# Altium PCB timer.PcbDoc (part 2 of 2)
Units mm, origin at the board's own origin, x right, y up, seen from the top; angles counter-clockwise.
Board outline 100 x 100 mm, 4 copper layers (Top Layer, Int1 (GND), Int2 (PWR), Bottom Layer), stack 1.369 mm thick; 158 components, 108 nets, 457 pads, 145 vias.
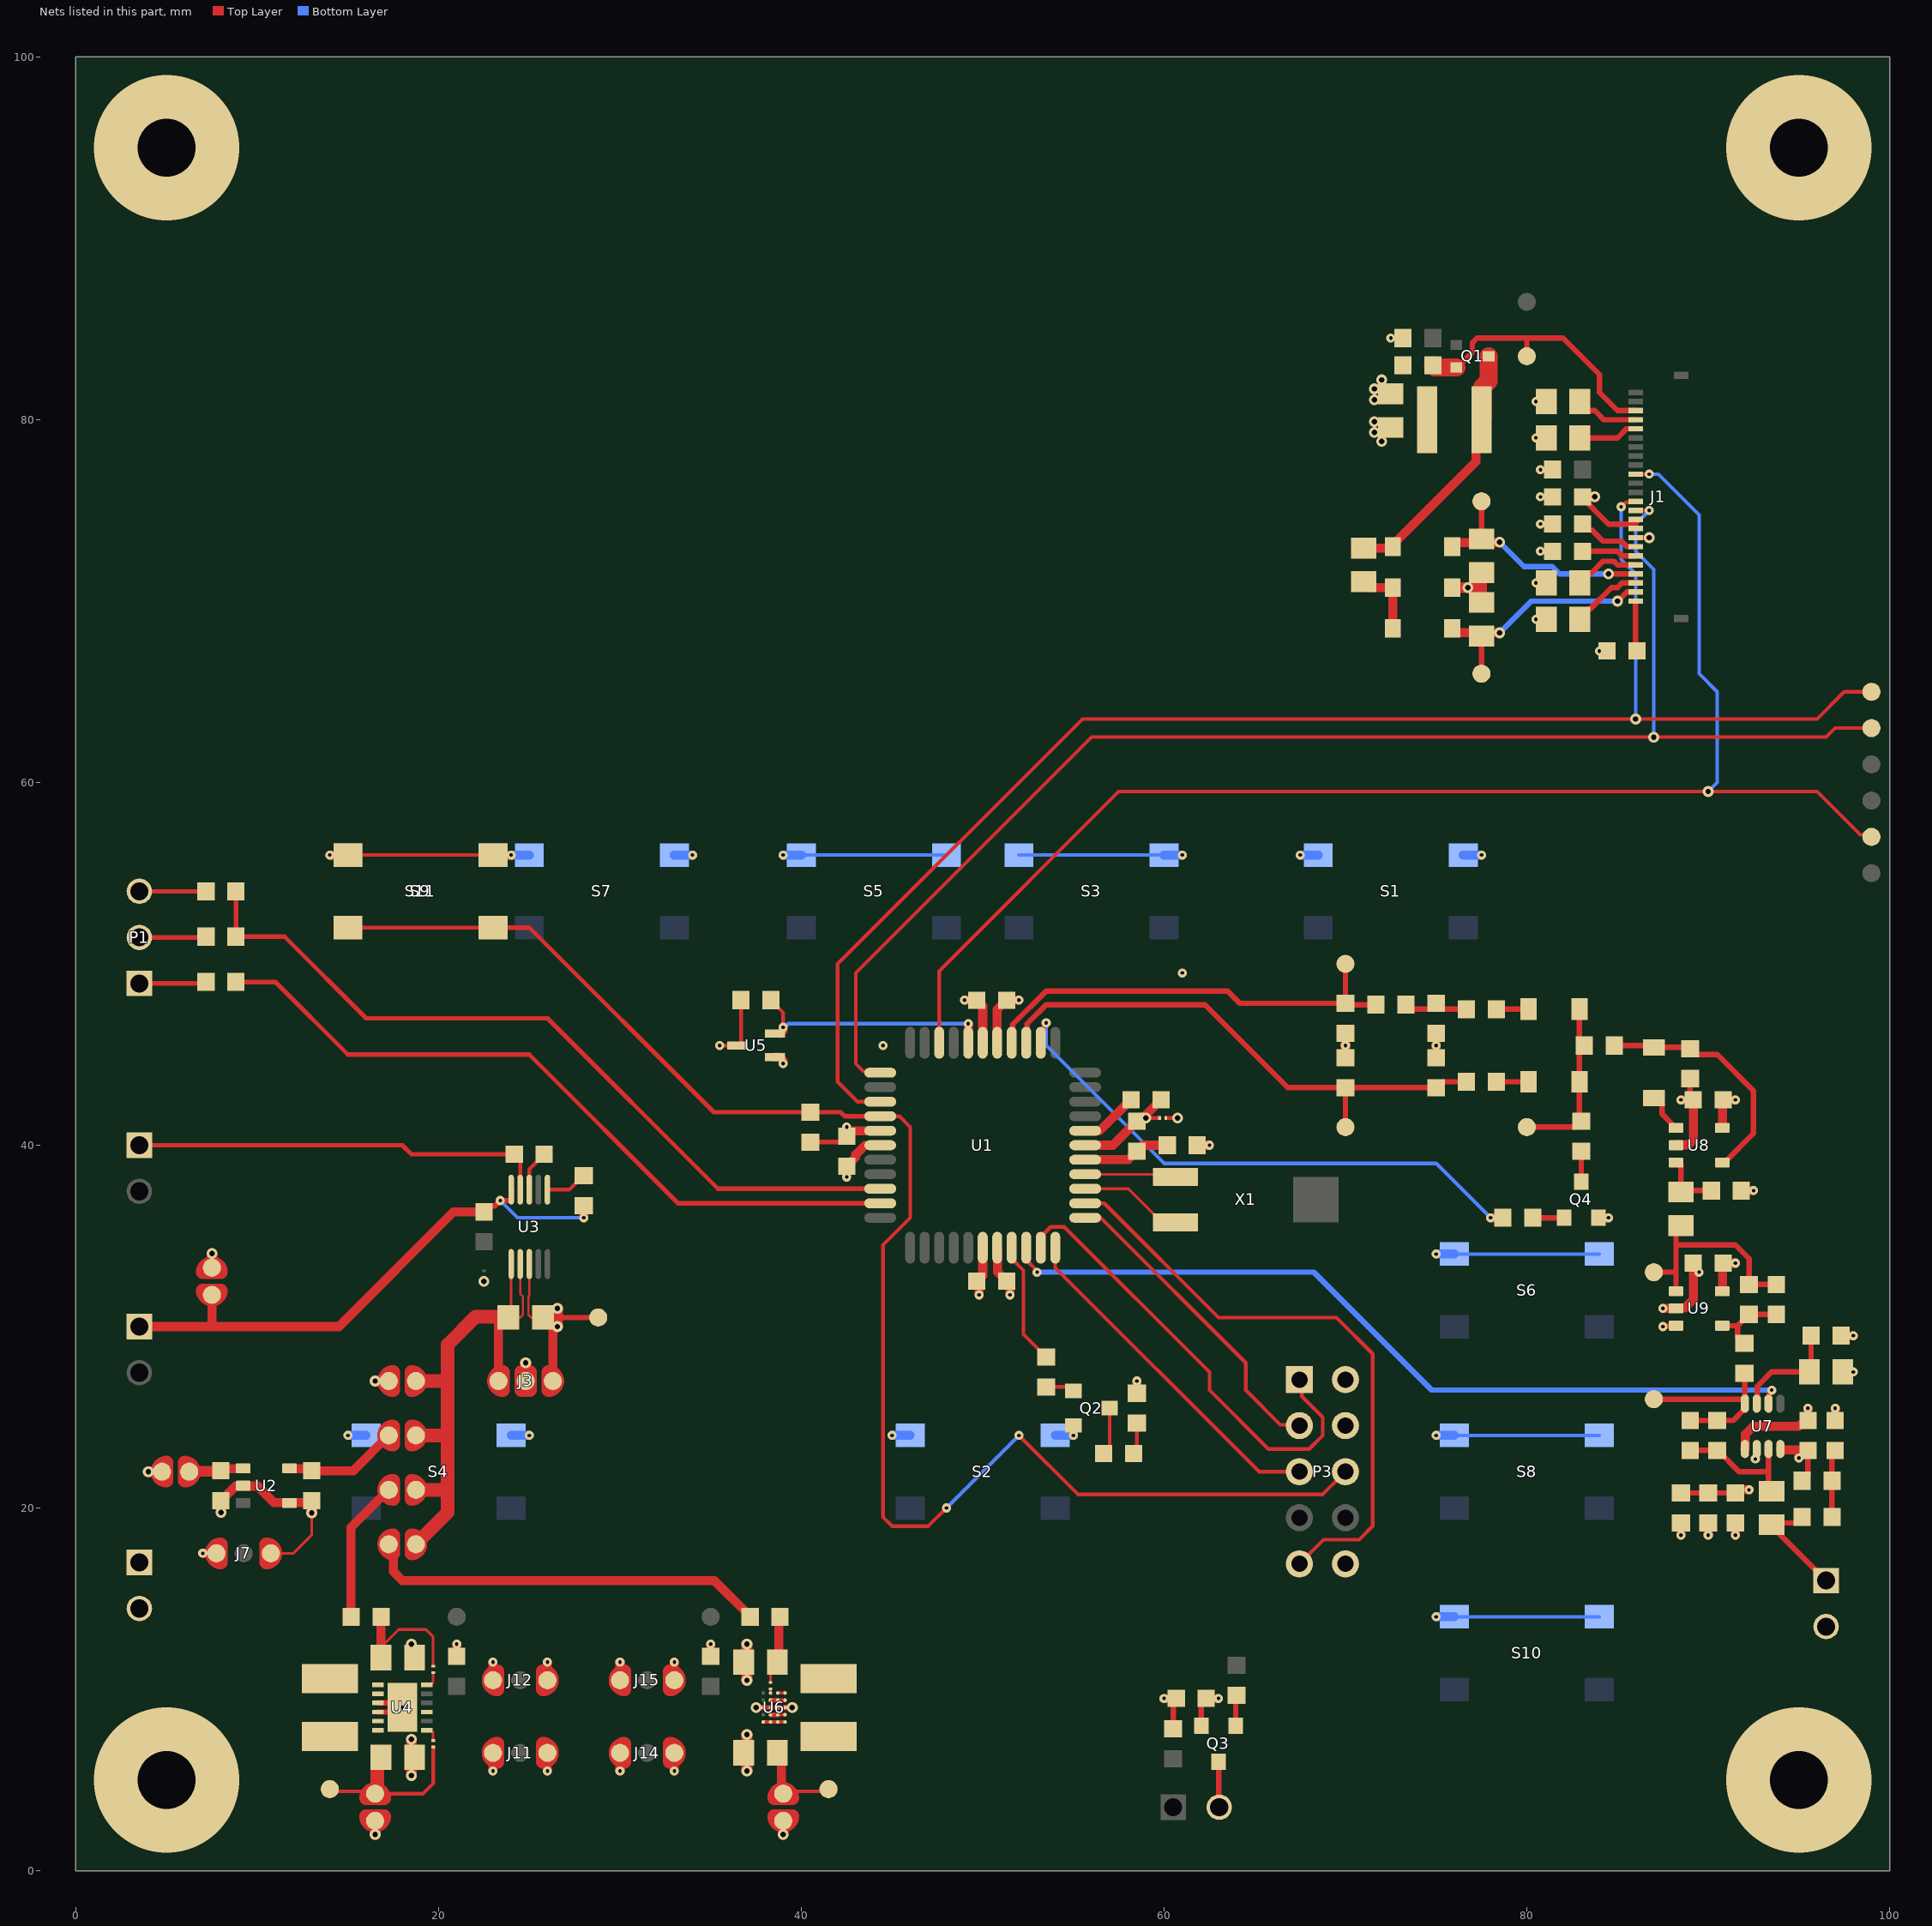
[diagram p4: the nets of this part, all layers, seen from the top]

## Via types
v1: diameter 0.5, hole 0.2, Top Layer to Bottom Layer, tented both sides, 98 vias
v2: diameter 0.6, hole 0.3, Top Layer to Bottom Layer, tented both sides, 41 vias
v3: diameter 8, hole 3.2, Top Layer to Bottom Layer, 4 vias
v4: diameter 0.6, hole 0.3, Top Layer to Bottom Layer, 2 vias

## Nets (pads, with @x,y where several pads share a name; then routed paths per layer and width w, separated by ;. In a path a pad name is that pad's centre, name@x,y a point inside that pad or via, vN(x,y) a via of type N, cw(c..) or ccw(c..) an arc to the next point about the centre after c; other vN are vias at no path point) (continued)
GND: C1.1 C2.1 C3.1 C5.2 C6.1 C7.1 C8.1 C9.1 C10.1 C11.1 C12.1 C13.1 C14.1 C15.1 C16.1 C17.1 C18.1 C19.1 C20.1 C23.1 C24.1 C25.1 C26.1 C27.1 C28.1 D2.2 J1.17 J7.1 J11.1 J12.1 J14.1 J15.1 NT1.1 NT2.1 NT5.1 P1.3 P3.2 P3.10 P4.2 Q2.2 Q3.2 R1.2 R2.2 R3.2 R6.2 S1.3 S1.4 S2.3 S2.4 S3.3 S3.4 S4.3 S4.4 S5.3 S5.4 S6.3 S6.4 S7.3 S7.4 S8.3 S8.4 S9.3 S9.4 S10.3 S10.4 S11.1 S11.2 U1.6 U1.18 U1.28 U1.39 U2.2 U2.4 U4.0 U4.9 U4.10 U5.1 U6.A3 U6.B3 U6.C3 U6.D3 | length 117.1
  Top Layer w0.15: J7.1@10.75,17.5 12,17.5 13,18.5 v2(13,19.73)
  Top Layer w0.2: S11.1@15,56 S11.2@23,56 ; v4(59,41.5) NT1.1@59.75,41.5
  Top Layer w0.25: P1.3@3.5,54 R6.2@7.175,54 ; U6.D3@37.9,9 U6.C3@38.3,9 U6.B3@38.7,9 U6.A3@39.1,9 ; C14.1@58.875,41.55 58.925,41.5 v4(59,41.5)
  Top Layer w0.3: U4.10@16.65,8.75 17.75,8.75 v1(18,9) 17.75,9.25 U4.9@16.65,9.25 ; v2(37.5,9) U6.D3@37.9,9 ; U6.A3@39.1,9 v2(39.5,9) ; Q3.2@62.05,8 62.05,9.225 C13.1@62.325,9.5 ; J1.17@86,73.5 v2(86.75,73.5)
  Top Layer w0.5: C19.1@8,20.405 8.8,21.205 9.2,21.205 U2.2@9.225,21.23 9.25,21.205 10.025,21.205 10.925,20.305 11.75,20.305 U2.4@11.775,20.28 11.8,20.305 12.9,20.305 C20.1@13,20.405 ; v1(14,56) S11.1@15,56 ; C25.1@21,12 v1(21,12.5) ; v1(23,5.5) J11.1@23,6 ; 23,11 v1(23,11.5) ; S11.2@23,56 v1(24,56) ; v1(33,5.5) J14.1@33,6 ; 33,11 v1(33,11.5) ; C28.1@35,12 v1(35,12.5) ; U5.1@38.55,44.85 38.825,44.85 39,44.675 v1(39,44.5) ; v1(42.5,38.25) C16.1@42.5,38.85 43,39.35 43,39.5 43.016,39.5 43.506,39.99 44.34,39.99 U1.6@44.35,40 ; v1(49,48) C18.1@49.675,48 50,47.675 U1.39@50,45.65 ; U1.18@50.8,34.35 50.81,34.34 50.81,33.015 C17.1@51.325,32.5 51.5,32.325 v1(51.5,31.75) ; v1(55,24) Q2.2@55,24.55 ; U1.28@55.65,40 57.175,40 C14.1@58.5,41.325 58.725,41.55 58.875,41.55 C15.1@59.825,42.5 ; C13.1@62.325,9.5 v1(63,9.5)
  Top Layer w0.6: v2(8,19.75) C19.1@8,20.405 ; C20.1@12.9,20.305 12.925,20.305 13,20.23 v2(13,19.73) ; v2(18.5,5.25) v2(18.5,7.25) ; v2(18.5,12.5) 18.5,12 18.5,11.925 C24.1@18.675,11.75 ; v2(37,5.5) v2(37,7.5) ; v2(37,10.5) v2(37,12.5) ; D2.2@75.885,70.75 v2(76.75,70.75) 77.5,70.75 ; C1.1@77.5,69.925 77.5,70.75 ; C5.2@77.5,71.575 77.5,70.75
  Bottom Layer w0.2: S5.3@40,56 S5.4@48,56 ; S3.3@52,56 S3.4@60,56 ; S10.3@76,14 S10.4@84,14 ; S8.3@76,24 S8.4@84,24 ; S6.3@76,34 S6.4@84,34
  Bottom Layer w0.5: v1(14,56) S9.3@15,56 ; v1(15,24) S4.3@16,24 ; S9.4@23,56 S7.3@25,56 ; S4.4@24,24 v1(25,24) ; S7.4@33,56 v1(34,56) ; v1(39,56) S5.3@40,56 ; v1(45,24) S2.3@46,24 ; S2.4@54,24 v1(55,24) ; S3.4@60,56 v1(61,56) ; v1(67.5,56) S1.3@68.5,56 ; v1(75,14) S10.3@76,14 ; v1(75,24) S8.3@76,24 ; v1(75,34) S6.3@76,34 ; S1.4@76.5,56 v1(77.5,56)
  other v1: 44.5,45.5 84,67.25 80.5,69 80.5,71 80.75,72.75 80.75,74.25 80.75,75.75 80.75,77.25 80.5,79 80.5,81 72.5,84.5
  other v2: 22.5,32.5 71.6,81.1 71.6,81.7 72,82.2
  other v3: 5,5 95,5 5,95 95,95
ISENSE: C21.2 P5.1 U3.9 | length 23
  Top Layer w0.2: C21.2@24.175,39.5 24.5,39.175 U3.9@24.5,37.55
  Top Layer w0.25: P5.1@3.5,40 18,40 18.5,39.5 C21.2@24.175,39.5
LOWBAT: R14.2 U1.40 U5.2 | length 14.1
  Top Layer w0.2: R14.2@38.325,48 38.325,47.975 39,47.3 v1(39,46.5) 39,46.325 39,46.275 38.875,46.15 38.825,46.15 U5.2@38.55,46.15
  Top Layer w0.5: U5.2@38.825,46.15 U5.2@39,46.325 ; U1.40@49.2,45.65 v1(49.2,46.7)
  Bottom Layer w0.2: v1(39,46.5) 39.081,46.5 39.281,46.7 v1(49.2,46.7)
MIC_AMP: C30.2 C34.1 R16.1 TP19.0 U9.1 | length 12.3
  Top Layer w0.3: TP19.0@87,33 88.225,33 ; U9.1@88.225,31.95 88.225,33 ; C34.1@88.5,35.675 88.225,35.4 88.225,34.5 ; C30.2@93.75,32.325 R16.1@92.25,32.325 92.25,33.75 91.5,34.5 88.225,34.5 ; 88.225,33 88.225,34.5
MIC_BLANK: R31.2 U1.35 | length 31.6
  Top Layer w0.2: U1.35@53.2,45.65 53.2,46.345 53.443,46.587 53.443,46.693 v1(53.5,46.75)
  Top Layer w0.5: v1(78,36) R31.2@78.675,36
  Bottom Layer w0.2: v1(53.5,46.75) 53.5,45.5 60,39 75,39 v1(78,36)
MIC_FAST: R19.1 R21.1 TP16.0 U1.37 | length 24.3
  Top Layer w0.3: U1.37@51.6,45.65 51.648,45.698 51.648,46.648 53.5,48.5 63.5,48.5 64.175,47.825 R21.1@70,47.825 ; TP16.0@70,50 R21.1@70,47.825 ; R19.1@71.675,47.75 70.075,47.75 R21.1@70,47.825
MIC_OFF: U1.20 U7.6 | length 45.6
  Top Layer w0.2: U1.20@52.4,34.35 52.4,33.675 53,33.075 v1(53,33)
  Top Layer w0.3: U7.6@93.325,25.75 93.354,25.779 93.354,26.3 93.5,26.446 v1(93.5,26.5)
  Bottom Layer w0.3: v1(53,33) 68.25,33 74.75,26.5 v1(93.5,26.5)
MIC_PRE: C37.1 R22.2 R29.2 TP17.0 U7.8 | length 10.3
  Top Layer w0.3: TP17.0@87,26 U7.8@92,26 ; C37.1@89,24.825 R29.2@90.5,24.825 91.375,24.825 92.025,25.475 U7.8@92.025,25.75 92.025,27.4 R22.2@92,27.425
MIC_RECT: D5.2 D7.2 R23.1 R30.1 TP18.0 | length 9.4
  Top Layer w0.3: TP18.0@80,41 82.675,41 R30.1@83,41.325 82.9,41.425 D7.2@82.9,43.5 D5.2@82.9,47.5
MIC_SLOW: C36.2 R27.1 R28.1 TP20.0 U1.36 | length 29.9
  Top Layer w0.3: U1.36@52.4,45.65 52.448,45.698 52.448,46.698 53.5,47.75 62.25,47.75 66.825,43.175 R28.1@70,43.175 ; TP20.0@70,41 R28.1@70,43.175 ; R27.1@76.675,43.5 75.325,43.5 C36.2@75,43.175 R28.1@70,43.175
MOSI: J1.14 TP8.0 U1.1 | length 82.1
  Top Layer w0.2: U1.1@44.35,44 44.283,44.067 43.433,44.067 43,44.5 43,49.5 56,62.5 v2(87,62.5) 96.5,62.5 97,63 TP8.0@99,63 ; J1.14@86,75 v1(86.75,75)
  Bottom Layer w0.2: v1(86.75,75) 86,74.25 86,72.75 87,71.75 v2(87,62.5)
NetC4_1: C4.1 D3.1 L1.2 Q1.3 | length 14.3
  Top Layer w0.5: C4.1@71,72.925 72.425,72.925 77.2,77.7 77.2,79.7 L1.2@77.5,80
  Top Layer w1: L1.2@77.5,80 77.55,80.05 77.55,81.8 77.889,82.139 Q1.3@77.889,83.5
NetC4_2: C4.2 D1.2 D2.1 | length 4
  Top Layer w0.5: C4.2@71,71 71.25,70.75 D2.1@72.615,70.75 D1.2@72.615,68.5
NetC14_2: C14.2 L2.1 U1.27 | length 4.9
  Top Layer w0.5: U1.27@55.65,39.2 58.025,39.2 C14.2@58.5,39.675 58.825,40 L2.1@60.175,40
NetC15_2: C15.2 U1.29 | length 3.2
  Top Layer w0.5: U1.29@55.65,40.8 55.66,40.81 56.469,40.81 57.859,42.2 57.875,42.2 C15.2@58.175,42.5
NetC21_1: C21.1 U3.8 | length 2.3
  Top Layer w0.2: U3.8@25,37.55 25,38.675 C21.1@25.825,39.5
NetC29_2: C29.2 L7.1 U7.7 | length 6.2
  Top Layer w0.3: U7.7@92.675,25.75 92.7,25.775 92.7,26.7 93.5,27.5 C29.2@95.575,27.5 95.675,27.6 L7.1@95.675,29.5
NetC30_1: C30.1 R16.2 R22.1 U9.4 | length 4.4
  Top Layer w0.3: U9.4@90.775,30.05 91.625,30.05 ; R22.1@92,29.075 91.975,29.075 91.65,29.4 91.65,29.425 91.625,29.45 91.625,30.05 ; C30.1@93.75,30.675 R16.2@92.25,30.675 92.225,30.675 91.801,30.251 91.801,30.226 91.625,30.05
NetC31_2: C31.2 R15.1 R24.1 | length 3.7
  Top Layer w0.3: R24.1@96.825,19.5 R15.1@96.825,21.5 96.825,23 C31.2@97,23.175
NetC33_2: C33.2 R18.1 R19.2 | length 3.4
  Top Layer w0.3: R19.2@73.325,47.5 75,47.5 R18.1@76.675,47.5
NetC34_2: C34.2 R25.1 U8.3 | length 3.4
  Top Layer w0.3: U8.3@88.225,39.05 88.35,39.05 88.5,38.9 88.5,37.5 R25.1@90.175,37.5
NetC35_1: C35.1 P7.1 R24.2 | length 6.2
  Top Layer w0.3: R24.2@95.175,19.5 94.85,19.175 93.5,19.175 93.825,18.85 93.825,18.675 P7.1@96.5,16
NetC35_2: C35.2 C37.2 R29.1 U7.3 | length 7.1
  Top Layer w0.3: C37.2@89,23.175 R29.1@90.5,23.175 90.525,23.175 91.7,22 93.325,22 ; C35.2@93.325,21 93.325,22 ; U7.3@93.325,23.25 93.325,22
NetD4_1: D4.1 R7.2 | length 1.7
  Top Layer w0.2: D4.1@58.325,23 58.5,23.175 R7.2@58.5,24.675
NetD4_2: D4.2 Q2.3 | length 2.6
  Top Layer w0.2: D4.2@56.675,23 57,23.325 Q2.3@57,25.5
NetD5_1: D5.1 R18.2 | length 1.8
  Top Layer w0.3: R18.2@78.325,47.5 D5.1@80.1,47.5
NetD6_1: D6.1 R23.2 R26.1 U8.4 | length 13.4
  Top Layer w0.3: R23.2@84.825,45.5 86.9,45.5 D6.1@87,45.4 88.925,45.4 R26.1@89,45.325 89.325,45 90.5,45 92.5,43 92.5,40.65 90.9,39.05 U8.4@90.775,39.05
NetD6_2: D6.2 U8.1 | length 2.3
  Top Layer w0.3: D6.2@87,42.6 87.15,42.6 87.45,42.3 87.45,41.725 87.975,41.2 87.975,41.075 88.1,40.95 U8.1@88.225,40.95
NetD7_1: D7.1 R27.2 | length 1.8
  Top Layer w0.3: R27.2@78.325,43.5 D7.1@80.1,43.5
NetL3_1: L3.1 U4.11
NetL3_2: L3.2 U4.8
NetL5_1: L5.1 U6.A2 U6.B2 U6.C2 | length 0.8
  Top Layer w0.2: U6.B2@38.7,8.6 U6.A2@39.1,8.6
  Top Layer w0.25: U6.C2@38.3,8.6 U6.B2@38.7,8.6
NetL5_2: L5.2 U6.A4 U6.B4 U6.C4 | length 0.8
  Top Layer w0.2: U6.B4@38.7,9.4 U6.A4@39.1,9.4
  Top Layer w0.25: U6.C4@38.3,9.4 U6.B4@38.7,9.4
NetNT3_1: NT3.1 U4.1 | length 0.8
  Top Layer w0.15: U4.1@19.35,7.75 19.55,7.75 19.7,7.6 NT3.1@19.7,7.175
NetNT4_1: NT4.1 U4.6 | length 0.9
  Top Layer w0.15: U4.6@19.35,10.25 19.55,10.25 19.7,10.4 NT4.1@19.7,10.925
NetNT5_2: NT5.2 U4.3
NetNT6_1: NT6.1 U6.C5 | length 0.2
  Top Layer w0.15: U6.C5@38.3,9.8 NT6.1@38.3,10.025
NetP2_2: P2.2 Q3.3 | length 2.5
  Top Layer w0.3: Q3.3@63,6 63.02,5.98 63.02,3.52 P2.2@63.04,3.5
NetQ2_1: Q2.1 R9.2 | length 1.6
  Top Layer w0.2: R9.2@53.5,26.675 54.775,26.675 Q2.1@55,26.45
NetQ3_1: Q3.1 R11.1 | length 1.7
  Top Layer w0.3: Q3.1@63.95,8 63.95,9.625 R11.1@64,9.675
NetQ4_1: Q4.1 R31.1 | length 1.7
  Top Layer w0.3: R31.1@80.325,36 Q4.1@82.05,36
NetQ4_3: Q4.3 R30.2 | length 1.7
  Top Layer w0.3: Q4.3@83,38 R30.2@83,39.675
NetR9_1: R9.1 U1.19 | length 6.8
  Top Layer w0.2: U1.19@51.6,34.35 51.6,33.75 52.25,33.1 52.25,29.575 R9.1@53.5,28.325
NetR13_1: R13.1 U3.6 | length 2.3
  Top Layer w0.2: U3.6@26,37.55 27.2,37.55 27.975,38.325 R13.1@28,38.325
NetU1_25: U1.25 X1.2 | length 5.7
  Top Layer w0.15: U1.25@55.65,37.6 58.025,37.6 59.875,35.75 X1.2@60.625,35.75
NetU1_26: U1.26 X1.1 | length 5
  Top Layer w0.15: U1.26@55.65,38.4 60.475,38.4 X1.1@60.625,38.25
PREVGH: C5.1 D3.2 J1.21 TP9.0 | length 13
  Top Layer w0.3: C5.1@77.5,73.425 TP9.0@77.5,75.5 ; v2(84.5,71.5) J1.21@86,71.5
  Top Layer w0.5: D3.2@75.885,73 75.885,73.041 76.075,73.231 78.481,73.231 v2(78.5,73.25)
  Bottom Layer w0.3: v2(78.5,73.25) 79.85,71.9 81.4,71.9 81.8,71.5 v2(84.5,71.5)
PREVGL: C1.2 D1.1 J1.23 TP10.0 | length 13.2
  Top Layer w0.3: TP10.0@77.5,66 C1.2@77.5,68.075 ; v2(85,70) 85.026,70 85.526,70.5 J1.23@86,70.5
  Top Layer w0.5: D1.1@75.885,68.5 75.885,68.459 76.075,68.269 78.481,68.269 v2(78.5,68.25)
  Bottom Layer w0.3: v2(78.5,68.25) 80.25,70 v2(85,70)
PVIN1: C23.2 J10.2 NT3.2 TP12.0 U4.12 | length 9.8
  Top Layer w0.2: TP12.0@14,4.5 14.125,4.375 16.375,4.375 J10.2@16.5,4.25 19.15,4.25 19.7,4.8 NT3.2@19.7,6.825
  Top Layer w0.75: J10.2@16.625,4.625 16.625,6.05 C23.2@16.825,6.25
PVIN2: C26.2 J13.2 TP14.0 U6.A1 U6.B1 U6.C1 U6.D1 | length 6.2
  Top Layer w0.2: U6.D1@37.9,8.2 U6.C1@38.3,8.2 U6.B1@38.7,8.2 U6.A1@39.1,8.2 ; J13.2@39,4.25 39.125,4.375 41.375,4.375 TP14.0@41.5,4.5
  Top Layer w0.5: C26.2@38.675,6.5 38.904,6.271 38.904,4.346 J13.2@39,4.25
REGIN: C19.2 J6.2 U2.1 | length 3
  Top Layer w0.5: C19.2@7.973,22.028 C19.2@8,22.055 8.1,22.155 9.2,22.155 U2.1@9.225,22.18
  Top Layer w0.6: J6.2@6.25,22 6.278,22.028 C19.2@7.973,22.028
RES#: J1.10 TP4.0 U1.42 | length 80.8
  Top Layer w0.2: U1.42@47.6,45.65 47.6,49.6 57.5,59.5 v2(90,59.5) 96,59.5 98.384,57.116 98.884,57.116 TP4.0@99,57 ; J1.10@86,77 v1(86.75,77)
  Bottom Layer w0.2: v1(86.75,77) 87.25,77 89.5,74.75 89.5,66 90.5,65 90.5,60 v2(90,59.5)
RESE: J1.3 Q1.2 R3.1 TP2.0 | length 15.5
  Top Layer w0.3: Q1.2@76.111,82.878 76.162,82.878 76.291,83.007 77,83.716 77,84.25 77.25,84.5 81,84.5 82,84.5 84,82.5 84,81.5 85,80.5 J1.3@86,80.5 ; TP2.0@80,83.5 80,84.5
  Top Layer w1: R3.1@74.825,83 74.947,82.878 Q1.2@76.111,82.878
RSTN: P3.6 R10.2 S11.3 S11.4 U1.4 | length 87.3
  Top Layer w0.2: S11.3@15,52 S11.4@23,52 ; U1.4@44.35,41.6 45.4,41.6 46,41 46,36 44.5,34.5 44.5,19.5 45,19 47,19 v1(48,20) ; v1(52,24) 55.25,20.75 68.75,20.75 P3.6@70,22
  Top Layer w0.25: S11.4@23,52 25,52 35.175,41.825 R10.2@40.5,41.825 42.159,41.825 42.384,41.6 U1.4@44.35,41.6
  Bottom Layer w0.2: v1(48,20) v1(52,24)
RXD: R5.2 R6.1 U1.9 | length 43.8
  Top Layer w0.25: R6.1@8.825,54 R5.2@8.825,51.5 11.5,51.5 16,47 26,47 35.4,37.6 U1.9@44.35,37.6
RXD_I: P1.2 R5.1 | length 3.7
  Top Layer w0.25: P1.2@3.5,51.46 7.135,51.46 R5.1@7.175,51.5
SCK: J1.13 TP7.0 U1.3 | length 85.5
  Top Layer w0.2: U1.3@44.35,42.4 43.1,42.4 42,43.5 42,50 55.5,63.5 v2(86,63.5) 96,63.5 97.5,65 TP7.0@99,65 ; v1(85.2,75.2) 85.217,75.2 85.467,75.45 85.95,75.45 J1.13@86,75.5
  Bottom Layer w0.2: v1(85.2,75.2) 85.2,72.3 86,71.5 v2(86,63.5)
SGND: C29.1 C31.1 C32.1 C33.1 C36.1 C38.1 C39.1 C40.1 NT1.2 P7.2 Q4.2 R20.2 R21.2 R25.2 R26.2 R28.2 U7.1 U8.2 U9.2 | length 20.9
  Top Layer w0.2: NT1.2@60.1,41.5 v4(60.75,41.5)
  Top Layer w0.3: R26.2@89,43.675 89,42.675 C40.1@89.175,42.5
  Top Layer w0.5: R28.2@70,44.825 R21.2@70,46.175 ; C36.1@75,44.825 v1(75,45.5) C33.1@75,46.175 ; Q4.2@83.95,36 v1(84.5,36) ; v1(87.5,31) U9.2@88.225,31 88.25,31.025 88.707,31.025 89.175,31.493 C39.1@89.175,33.5 ; U8.2@88.225,40 88.25,40.025 88.907,40.025 89.175,40.293 C40.1@89.175,42.5 v1(88.5,42.5) ; v1(90,18.5) R20.2@90,19.175 ; v1(91.5,18.5) C32.1@91.5,19.175 ; R25.2@91.825,37.5 v1(92.5,37.5) ; U7.1@92.025,23.25 92.05,23.275 92.05,24.05 92.5,24.5 95,24.5 95.1,24.6 95.275,24.6 C38.1@95.5,24.825 v1(95.5,25.5) ; C31.1@97,24.825 v1(97,25.5)
  other v1: 98,27.5 89.5,33 70,45.5 61,49.5
TCK: P3.1 U1.21 | length 26
  Top Layer w0.2: U1.21@53.2,34.35 53.2,34.95 53.75,35.5 54.5,35.5 62.5,27.5 62.5,26.5 65.75,23.25 68,23.25 68.75,24 68.75,25 67.603,26.147 67.603,26.937 P3.1@67.46,27.08
TDI: P3.9 U1.24 | length 33.7
  Top Layer w0.2: U1.24@55.65,36.8 56.7,36.8 63,30.5 69.5,30.5 71.5,28.5 71.5,19 70.75,18.25 68.79,18.25 P3.9@67.46,16.92
TDO: P3.3 U1.23 | length 17.4
  Top Layer w0.2: U1.23@55.65,36 56.5,36 64.5,28 64.5,26.5 66.41,24.59 67.41,24.59 P3.3@67.46,24.54
TMS: P3.5 U1.22 | length 19.2
  Top Layer w0.2: U1.22@54,34.35 54,33.245 65.245,22 P3.5@67.46,22
TXD: R4.2 U1.10 | length 40.6
  Top Layer w0.25: R4.2@8.825,49 11,49 15,45 25,45 33.2,36.8 U1.10@44.35,36.8
TXD_O: P1.1 R4.1 | length 3.7
  Top Layer w0.25: P1.1@3.5,48.92 7.095,48.92 R4.1@7.175,49
VBAT: J2.1 J6.1 J7.3 J9.2 J10.1 J11.3 J12.3 J13.1 J14.3 J15.3 P4.1 | length 6
  Top Layer w0.5: v1(7,17.5) J7.3@7.5,17.5 ; v1(26,5.5) J11.3@26,6 ; 26,11 v1(26,11.5) ; v1(30,5.5) J14.3@30,6 ; 30,11 v1(30,11.5)
  Top Layer w0.6: v2(4,22) J6.1@4.5,22 ; J9.2@7.5,33 J9.2@7.5,33.25 v2(7.5,34.027) ; v2(16.5,2) J10.1@16.5,2.5 ; v2(16.5,27) J2.1@17.25,27 J2.1@17.5,27 ; v2(39,2) J13.1@39,2.5
VBIAS: C38.2 C39.2 C40.2 R15.2 R17.1 U7.4 U8.5 U9.5 | length 9
  Top Layer w0.3: R15.2@95.175,21.5 95.5,21.825 C38.2@95.5,23.175
  Top Layer w0.5: v1(88.5,18.5) R17.1@88.5,19.175 ; U9.5@90.775,31.95 90.8,31.975 90.8,33.475 C39.2@90.825,33.5 v1(91.5,33.5) ; U8.5@90.775,40.95 90.8,40.975 90.8,42.475 C40.2@90.825,42.5 v1(91.5,42.5) ; U7.4@93.975,23.25 93.975,23.237 94,23.213 95,23.213 ; v1(95,22.75) 95,23.213 ; C38.2@95.5,23.175 95.462,23.213 95,23.213
VCC: C13.2 C16.2 C17.2 C18.2 J3.1 L2.2 L7.2 P3.4 R7.1 R8.2 R10.1 R12.2 R14.1 TP11.0 U1.5 U1.17 U1.38 U3.3 U5.3 | length 28.9
  Top Layer w0.127: U3.3@25,33.45 25,31.7 24.95,31.65 24.95,30.65 25.1,30.5 R12.2@25.75,30.5
  Top Layer w0.2: v1(35.5,45.5) U5.3@36.45,45.5 36.55,45.5 36.675,45.625 R14.1@36.675,48 ; C16.2@42.175,40.175 C16.2@42.5,40.5
  Top Layer w0.25: R10.1@40.5,40.175 C16.2@42.175,40.175
  Top Layer w0.3: R12.2@25.75,30.5 26.55,30.5 TP11.0@28.8,30.5 ; R8.2@60.5,7.825 60.5,9.325 C13.2@60.675,9.5
  Top Layer w0.5: J3.1@26.3,27 R12.2@26.3,29.973 ; C16.2@42.5,40.5 42.8,40.8 U1.5@44.35,40.8 ; v1(49.8,31.75) 49.8,32.375 C17.2@49.675,32.5 50,32.825 U1.17@50,34.35 ; U1.38@50.8,45.65 50.8,47.475 C18.2@51.325,48 v1(52,48) ; R7.1@58.5,26.325 v1(58.5,27) ; v1(60,9.5) C13.2@60.675,9.5 ; L2.2@61.825,40 v1(62.5,40) ; L7.2@97.325,29.5 v1(98,29.5)
  Top Layer w0.6: v2(26.55,30) 26.55,30.5 v2(26.55,31)
  other v1: 42.5,41
VCC_EPD: C6.2 C7.2 J1.15 J1.16 J3.2 L1.1 | length 6.1
  Top Layer w0.3: C7.2@83,75.75 84.5,74.25 86,74.25 ; J1.16@86,74 86,74.25 ; J1.15@86,74.5 86,74.25
  Top Layer w0.6: J3.2@24.8,27 v2@24.8,27.75 ; v2(24.8,28) v2@24.8,27.75 ; 25.05,27.5 v2@24.8,27.75 ; C7.2@83.075,75.75 v2(83.75,75.75)
  other v2: 72,78.8 71.6,79.3 71.6,79.9
VCC_ISENSE: C22.2 J9.1 P6.1 R13.2 U3.10 | length 31.5
  Top Layer w0.3: C22.2@22.5,36.325 22.825,36.65 23.1,36.65 v1(23.4,36.95) 24,36.95 U3.10@24,37.55
  Top Layer w0.5: P6.1@3.5,30 7.5,30 ; J9.1@7.5,31.75 7.5,30 ; C22.2@22.5,36.325 22.413,36.413 22.325,36.325 20.825,36.325 14.5,30 7.5,30 ; v1(28,36) R13.2@28,36.675
  Bottom Layer w0.2: v1(23.4,36.95) 24.35,36 v1(28,36)
VCOM: C12.2 J1.24 | length 2.8
  Top Layer w0.3: J1.24@86,70 86,67.325 C12.2@86.075,67.25
VDC1: J5.1 L4.2 | length 7.9
  Top Layer w0.5: L4.2@15.175,14 15.175,18.925 J5.1@17.25,21
VDC2: J8.1 L6.2 | length 21.7
  Top Layer w0.5: 17.5,17.5 17.5,16.5 18,16 35.2,16 37.175,14.025 L6.2@37.175,14
VDCO1: C24.2 L4.1 NT4.2 U4.7 | length 7.6
  Top Layer w0.15: C24.2@17,12 17,12.5 17.8,13.3 19.3,13.3 19.7,12.9 NT4.2@19.7,11.275
  Top Layer w0.5: C24.2@16.825,11.75 L4.1@16.825,14
VDCO2: C27.2 L6.1 NT6.2 U6.A5 U6.B5 | length 4.2
  Top Layer w0.15: NT6.2@38.3,10.375 38.3,11.125 C27.2@38.675,11.5 ; U6.B5@38.7,9.8 U6.A5@39.1,9.8
  Top Layer w0.5: C27.2@38.675,11.5 38.75,11.575 38.75,13.925 L6.1@38.825,14
VDD: C8.2 J1.18 | length 3.4
  Top Layer w0.3: C8.2@83.075,74.25 83.4,73.925 83.575,73.925 84.189,73.311 85.211,73.311 85.523,73 J1.18@86,73
VGH: C3.2 J1.5 | length 3.3
  Top Layer w0.3: C3.2@82.925,79 85,79 85.5,79.5 J1.5@86,79.5
VGL: C2.2 J1.4 | length 3.5
  Top Layer w0.3: C2.2@82.925,81 82.925,80.925 83.35,80.5 83.75,80.5 84.25,80 J1.4@86,80
VHALF: C32.2 R17.2 R20.1 U7.2 U9.3 | length 4.6
  Top Layer w0.3: v1(87.5,30) 87.525,30.025 88.2,30.025 U9.3@88.225,30.05 ; R17.2@88.5,20.825 R20.1@90,20.825 C32.2@91.5,20.825
  Top Layer w0.5: C32.2@91.5,20.825 91.675,21 v1(92.25,21)
  Bottom Layer w0.3: v1@92.562,22.662 v1(92.6,22.7)
VIN: J2.2 J3.3 J4.2 J5.2 J8.2 R12.1 U3.1 U3.2 | length 31.1
  Top Layer w0.127: R12.1@23.85,30.5 24,30.5 24.5,30.5 24.65,30.65 24.65,31.65 24.5,31.8 U3.2@24.5,33.45
  Top Layer w0.15: R12.1@23.8,30.55 R12.1@23.85,30.5 ; R12.1@24,30.55 U3.1@24,33.45
  Top Layer w0.5: J3.3@23.3,27 23.3,27.5 R12.1@23.3,30.5
  Top Layer w0.75: J8.2@18.75,18 18.956,18.206 20.5,19.75 20.5,21 ; J5.2@18.75,21 19,21 20.5,21 ; J4.2@18.75,24 19,24 20.5,24 ; J2.2@18.75,27 19,27 20.5,27 ; R12.1@23.8,30.55 23.3,30.55 22.05,30.55 20.5,29 20.5,27 ; 20.5,21 20.5,24 ; 20.5,24 20.5,27
VPP: C9.2 J1.19 | length 3
  Top Layer w0.3: C9.2@83.075,72.75 85,72.75 85.25,72.5 J1.19@86,72.5
VREG: C20.2 J4.1 U2.5 | length 6.3
  Top Layer w0.5: U2.5@11.775,22.18 11.8,22.155 12.9,22.155 C20.2@13,22.055 15.305,22.055 J4.1@17.25,24
VSH: C10.2 J1.20 | length 3.7
  Top Layer w0.3: C10.2@82.925,71 82.925,71.125 83.35,71.55 83.55,71.55 84.2,72.2 84.8,72.2 85,72 J1.20@86,72
VSL: C11.2 J1.22 | length 4
  Top Layer w0.3: C11.2@82.925,69 82.925,69.125 83.35,69.55 83.475,69.55 84.675,70.75 85,70.75 85.25,71 J1.22@86,71
pads on no net: J1.0 J1.1 J1.6 J1.7 P3.7 P3.8 U1.2 U1.7 U1.8 U3.4 U7.5 X1.0

## Polygon pours and split planes (outlines as drawn)
SGND on Top Layer "MIC_SGND" (solid, remove dead copper, pour order 1): 99.5,11 92.5,11 85.5,18 85.5,32.5 83,35 83,37 82,37 78.5,40.5 66.5,40.5 66,41 60.5,41 60.5,46.5 52,46.5 52,50.5 99.5,50.5
VCC_EPD on Top Layer "EPD_BOOST_VCC" (solid, remove dead copper, pour order 6): 72,78.1 75.1,78.1 75.1,81.9 73.9,81.9 73.9,80.9 73.2,80.2 71.3,80.2 71.3,78.8
GND on Top Layer "EPD_BOOST_GND" (solid, remove dead copper, pour order 5): 73.2,80.8 73.2,82 73.7,82.5 73.7,83.5 72.7,83.5 71.3,82.1 71.3,80.8
NetL5_2 on Top Layer "INDCON1" (solid, remove dead copper, pour order 4): 39,9.3 39.8,9.3 40.5,10 40.05,10.45 39.1,9.5 39,9.5
NetL5_1 on Top Layer "INDCON2" (solid, remove dead copper, pour order 3): 39,8.5 39.1,8.5 40,7.6 40,7.4 40.3,7.4 40.3,8.2 39.8,8.7 39,8.7
AGND on Top Layer "ISENSE_AGND" (solid, remove dead copper, pour order 0): 0.5,25 12,25 20,33 29.5,33 29.5,42.5 0.5,42.5
GND on Top Layer "TOP_GND_FILL" (solid, remove dead copper, pour order 7): 0,100 100,100 100,0 45,0 45,14.5 10.5,14.5 10.5,0 0,0
GND on Bottom Layer "BTM_GND_FILL" (solid, remove dead copper, pour order 2): 0,100 100,100 100,0 0,0
AGND on Int1 (GND) (split plane): 29.349,34 29.349,33.151 19,33.151 18.961,33.146 18.939,33.137 18.924,33.131 18.893,33.107 10.937,25.151 0.51,25.151 0.51,42.349 29.349,42.349
GND on Int1 (GND) (split plane): 99.49,50.651 60,50.651 59.961,50.646 59.924,50.631 59.893,50.607 59.869,50.576 59.854,50.539 59.849,50.5 59.849,40.5 59.854,40.461 59.869,40.424 59.893,40.393 59.924,40.369 59.961,40.354 60,40.349 77.937,40.349 85.349,32.937 85.349,18 85.354,17.961 85.363,17.939 85.369,17.924 85.393,17.893 92.393,10.893 92.424,10.869 92.439,10.863 92.461,10.854 92.5,10.849 99.49,10.849 99.49,0.51 45.151,0.51 45.151,14 45.146,14.039 45.131,14.076 45.107,14.107 45.076,14.131 45.039,14.146 45,14.151 38,14.151 37.961,14.146 37.924,14.131 37.893,14.107 37.869,14.076 37.854,14.039 37.849,14 37.854,13.961 37.869,13.924 37.893,13.893 37.924,13.869 37.961,13.854 38,13.849 44.849,13.849 44.849,0.51 28.151,0.51 28.151,13.849 36.5,13.849 36.539,13.854 36.576,13.869 36.607,13.893 36.631,13.924 36.646,13.961 36.651,14 36.646,14.039 36.631,14.076 36.607,14.107 36.576,14.131 36.539,14.146 36.5,14.151 16,14.151 15.961,14.146 15.924,14.131 15.893,14.107 15.869,14.076 15.854,14.039 15.849,14 15.854,13.961 15.869,13.924 15.893,13.893 15.924,13.869 15.961,13.854 16,13.849 27.849,13.849 27.849,0.51 10.651,0.51 10.651,13.849 14.5,13.849 14.539,13.854 14.576,13.869 14.607,13.893 14.631,13.924 14.646,13.961 14.651,14 14.646,14.039 14.631,14.076 14.607,14.107 14.576,14.131 14.539,14.146 14.5,14.151 10.5,14.151 10.461,14.146 10.424,14.131 10.393,14.107 10.369,14.076 10.354,14.039 10.349,14 10.349,0.51 0.51,0.51 0.51,24.849 11,24.849 11.039,24.854 11.061,24.863 11.076,24.869 11.107,24.893 19.063,32.849 29.5,32.849 29.539,32.854 29.576,32.869 29.607,32.893 29.631,32.924 29.646,32.961 29.651,33 29.651,34 29.651,42.5 29.646,42.539 29.631,42.576 29.607,42.607 29.576,42.631 29.539,42.646 29.5,42.651 0.51,42.651 0.51,99.49 99.49,99.49
SGND on Int1 (GND) (split plane): 99.49,11.151 92.563,11.151 85.651,18.063 85.651,33 85.646,33.039 85.631,33.076 85.607,33.107 78.107,40.607 78.076,40.631 78.061,40.637 78.039,40.646 78,40.651 60.151,40.651 60.151,50.349 99.49,50.349
VBAT on Int2 (PWR) (split plane): 27.849,36.063 23.893,32.107 23.869,32.076 23.863,32.061 23.854,32.039 23.849,32 23.849,27 23.854,26.961 23.869,26.924 23.893,26.893 23.924,26.869 23.961,26.854 24,26.849 31.937,26.849 44.849,13.937 44.849,0.51 0.51,0.51 0.51,47.349 27.849,47.349
VCC_EPD on Int2 (PWR) (split plane): 99.49,58.151 41,58.151 40.961,58.146 40.924,58.131 40.893,58.107 30.393,47.607 30.369,47.576 30.354,47.539 30.349,47.5 30.349,36.063 27.393,33.107 25.893,31.607 25.869,31.576 25.854,31.539 25.849,31.5 25.849,27.151 24.151,27.151 24.151,31.937 28.107,35.893 28.131,35.924 28.146,35.961 28.151,36 28.151,47.5 28.146,47.539 28.131,47.576 28.107,47.607 28.076,47.631 28.039,47.646 28,47.651 0.51,47.651 0.51,99.49 99.49,99.49
VCC on Int2 (PWR) (split plane): 99.49,0.51 45.151,0.51 45.151,14 45.146,14.039 45.137,14.061 45.131,14.076 45.107,14.107 32.107,27.107 32.076,27.131 32.039,27.146 32,27.151 26.151,27.151 26.151,31.437 27.607,32.893 30.607,35.893 30.631,35.924 30.646,35.961 30.651,36 30.651,47.437 41.063,57.849 99.49,57.849
VHALF on Int2 (PWR) (split plane): 90.349,29.5 90.354,29.461 90.363,29.439 90.369,29.424 90.393,29.393 93.849,25.937 93.849,24 93.849,20.563 92.937,19.651 87.651,19.651 87.651,27.5 87.646,27.539 87.631,27.576 87.607,27.607 86.151,29.063 86.151,30.849 90.349,30.849
VBIAS on Int2 (PWR) (split plane): 92.349,30.5 92.354,30.461 92.363,30.439 92.369,30.424 92.393,30.393 96.849,25.937 96.849,20.563 93.937,17.651 87.651,17.651 87.651,19.349 93,19.349 93.039,19.354 93.061,19.363 93.076,19.369 93.107,19.393 94.107,20.393 94.131,20.424 94.146,20.461 94.151,20.5 94.151,24 94.151,26 94.146,26.039 94.137,26.061 94.131,26.076 94.107,26.107 90.651,29.563 90.651,43.349 92.349,43.349

## Keep-outs
Keep-Out Layer:
  lines w0.15: 0,0 0,100 100,100 100,0 0,0 ; 91,68.5 ccw(c93,68.5) 95,68.5 95,83 ccw(c93,83) 91,83 91,68.5

## Other copper
Top Layer:
  region: 39.1,8.675
  region: 39.1,8.5
  region net VDCO2: 39.2,9.8 39.2,10.9 38.6,10.9 38.6,9.8
  region net PVIN2: 39.2,8.2 39.2,7.1 38.2,7.1 38.2,8.2
  region net VDCO1: 16.9,10.3 17.4,10.8 17.4,11.2 16.3,11.2 16.3,10.3
  region net PVIN1: 16.9,7.7 16.9,6.8 16.4,6.8 16.4,7.7
  region net NetL3_1: 16.6,8.1 16.3,8.1 15.5,7.3 15.4,7.3 14.95,7.75 15.6,8.4 16.6,8.4
  region net NetL3_2: 16.6,9.9 16.3,9.9 15.5,10.7 15.4,10.7 14.95,10.25 15.6,9.6 16.6,9.6
  pour cut-out: 59,39 67,39 67,35 59,35
Bottom Layer:
  pour cut-out: 10.5,0 45,0 45,15 10.5,15
Int1 (GND) (plane layer: these items are gaps in the copper):
  region: 54.5,39 70,39 70,35 59,35 57,37 54.5,37
  lines w0.3: 0,25 11,25 19,33 22,33 29.5,33 29.5,34 29.5,42.5 0,42.5 ; 10.5,0 10.5,14 14.5,14 ; 16,14 28,14 ; 28,0 28,14 ; 36.5,14 28,14 ; 38,14 45,14 45,0 ; 100,11 92.5,11 85.5,18 85.5,33 78,40.5 60,40.5 60,50.5 100,50.5
Int2 (PWR) (plane layer: these items are gaps in the copper):
  region: 54.5,39 70,39 70,35 59,35 57,37 54.5,37
  lines w0.3: 0,47.5 28,47.5 28,36 24,32 24,27 26,27 ; 45,0 45,14 32,27 26,27 ; 90.5,31 86,31 86,29 87.5,27.5 87.5,19.5 ; 100,58 55,58 41,58 30.5,47.5 30.5,36 27.5,33 26,31.5 26,27 ; 87.5,19.5 87.5,17.5 94,17.5 97,20.5 97,26 92.5,30.5 92.5,43.5 90.5,43.5 90.5,29.5 94,26 94,24 94,20.5 93,19.5 87.5,19.5

## Silkscreen, mask and mechanical layers (free items; w line width, h text height)
Top Overlay:
  lines w0.15: 0.5,51.5 2,51.5 ; 1,48.5 0.5,49 ; 1,49.5 0.5,49 ; 1.5,51 2,51.5 ; 1.5,52 2,51.5 ; 2,49 0.5,49 ; 0.5,49 0.5,49 ; 0.5,49 0.5,49 ; 2,51.5 2,51.5 ; 2,51.5 2,51.5
  text "GDR" at 81.15,86.15 h1
  text "RESE" at 81.15,83.15 h1
  text "PREVGH" at 71.15,75.65 h1
  text "PREVGL" at 71.65,65.15 h1
  text "SCK" at 94.15,64.65 h1
  text "MOSI" at 94.15,62.65 h1
  text "CS#" at 94.15,60.65 h1
  text "D/C#" at 94.15,58.65 h1
  text "RES#" at 94.15,56.65 h1
  text "GND" at 0.65,55.333 h1 r270
  text "BUSY" at 94.15,54.65 h1
  text "RST" at 17.65,49.15 h1
  text "+" at 1.483,42.333 h1 r270
  text "ISENSE" at 0.65,41.249 h1 r270
  text "VSENSE" at 8.918,32.65 h1
  text "+" at 1.483,32.333 h1 r270
  text "VSENSE" at 0.65,31.332 h1 r270
  text "TO BAT" at 8.918,31.15 h1
  text "BAT" at 19.667,26.65 h1
  text "MEAS EPD PWR" at 27.419,26.4 h1
  text "N" at 23.667,24.65 h1
  text "Y" at 25.417,24.65 h1
  text "LDO" at 19.667,23.65 h1
  text "LDO" at 0.667,21.65 h1
  text "DC1" at 19.584,20.65 h1
  text "+" at 0.983,19.333 h1 r270
  text "DC2" at 19.667,17.65 h1
  text "VBAT" at 0.65,17.333 h1 r270
  text "+" at 99.017,17.167 h1 r90
  text "EN" at 6.667,15.15 h1
  text "MIC" at 99.35,13.25 h1 r90
  text "BMON" at 26.167,12.65 h1
  text "EN" at 27.167,10.15 h1
  text "1" at 24.333,8.15 h1
  text "2" at 31.167,8.15 h1
  text "Mum's Timer 1.0" at 68.95,8.05 h1.2
  text "EN" at 27.167,6.15 h1
  text "D.Watman" at 68.95,6.15 h1.2
  text "Sept 2020" at 68.95,4.35 h1.2
  text "PVIN1" at 9.167,3.9 h1
  text "PVIN2" at 42.251,3.9 h1
  text "DC-DC" at 25.667,3.15 h1
  text "DC1" at 17.834,2.65 h1
  text "DC2" at 35.167,2.65 h1
  text "+" at 59.017,2.167 h1 r90
  text "JLCJLCJLCJLC" at 77.45,1.4 h1.2
  text "BUZZER" at 59.168,0.65 h1
Bottom Overlay:
  lines w0.15: 20,58 20,80 ; 28,58 28,80 ; 35.5,62.5 35.5,72.5 ; 44,58 44,80 ; 56,58 56,80 ; 64.5,62.5 64.5,72.5 ; 72.5,58 72.5,80 ; 89,69.5 94,69.5 94,82 89,82 ; 10,58 89,58 89,95 10,95 10,58
  text "1" at 19,46.5 h3
  text "10" at 31.249,46.5 h3
  text "1" at 44.5,46.5 h3
  text "10" at 58.249,46.5 h3
  text "1" at 73,46.5 h3
  text "SEC" at 30.665,39.5 h5
  text "MIN" at 56.248,39.5 h5
  text "HR" at 76.665,39.5 h5
  text "M1" at 93.332,29.5 h5
  text "M2" at 94.165,19.5 h5
  text "CLR" at 26.665,12.5 h5
  text "M3" at 94.165,9.5 h5
  text "START / STOP" at 64.662,5 h5

## Text inside footprints (layer, text, board x,y; h text height)
P3: Top Overlay "2" at 69.492,29.62 h1.27 r270; Top Overlay "1" at 66.952,29.112 h1.27 r270; Top Overlay "9" at 66.952,15.396 h1.27 r270; Top Overlay "10" at 69.492,15.396 h1.27 r270